# Altium PCB Primerpcb.PcbDoc
Units mm, origin at the board's own origin, x right, y up, seen from the top; angles counter-clockwise.
Board outline 40.26 x 40.5 mm, 2 copper layers (Top Layer, Bottom Layer); 10 components, 6 nets, 26 pads, 0 vias.
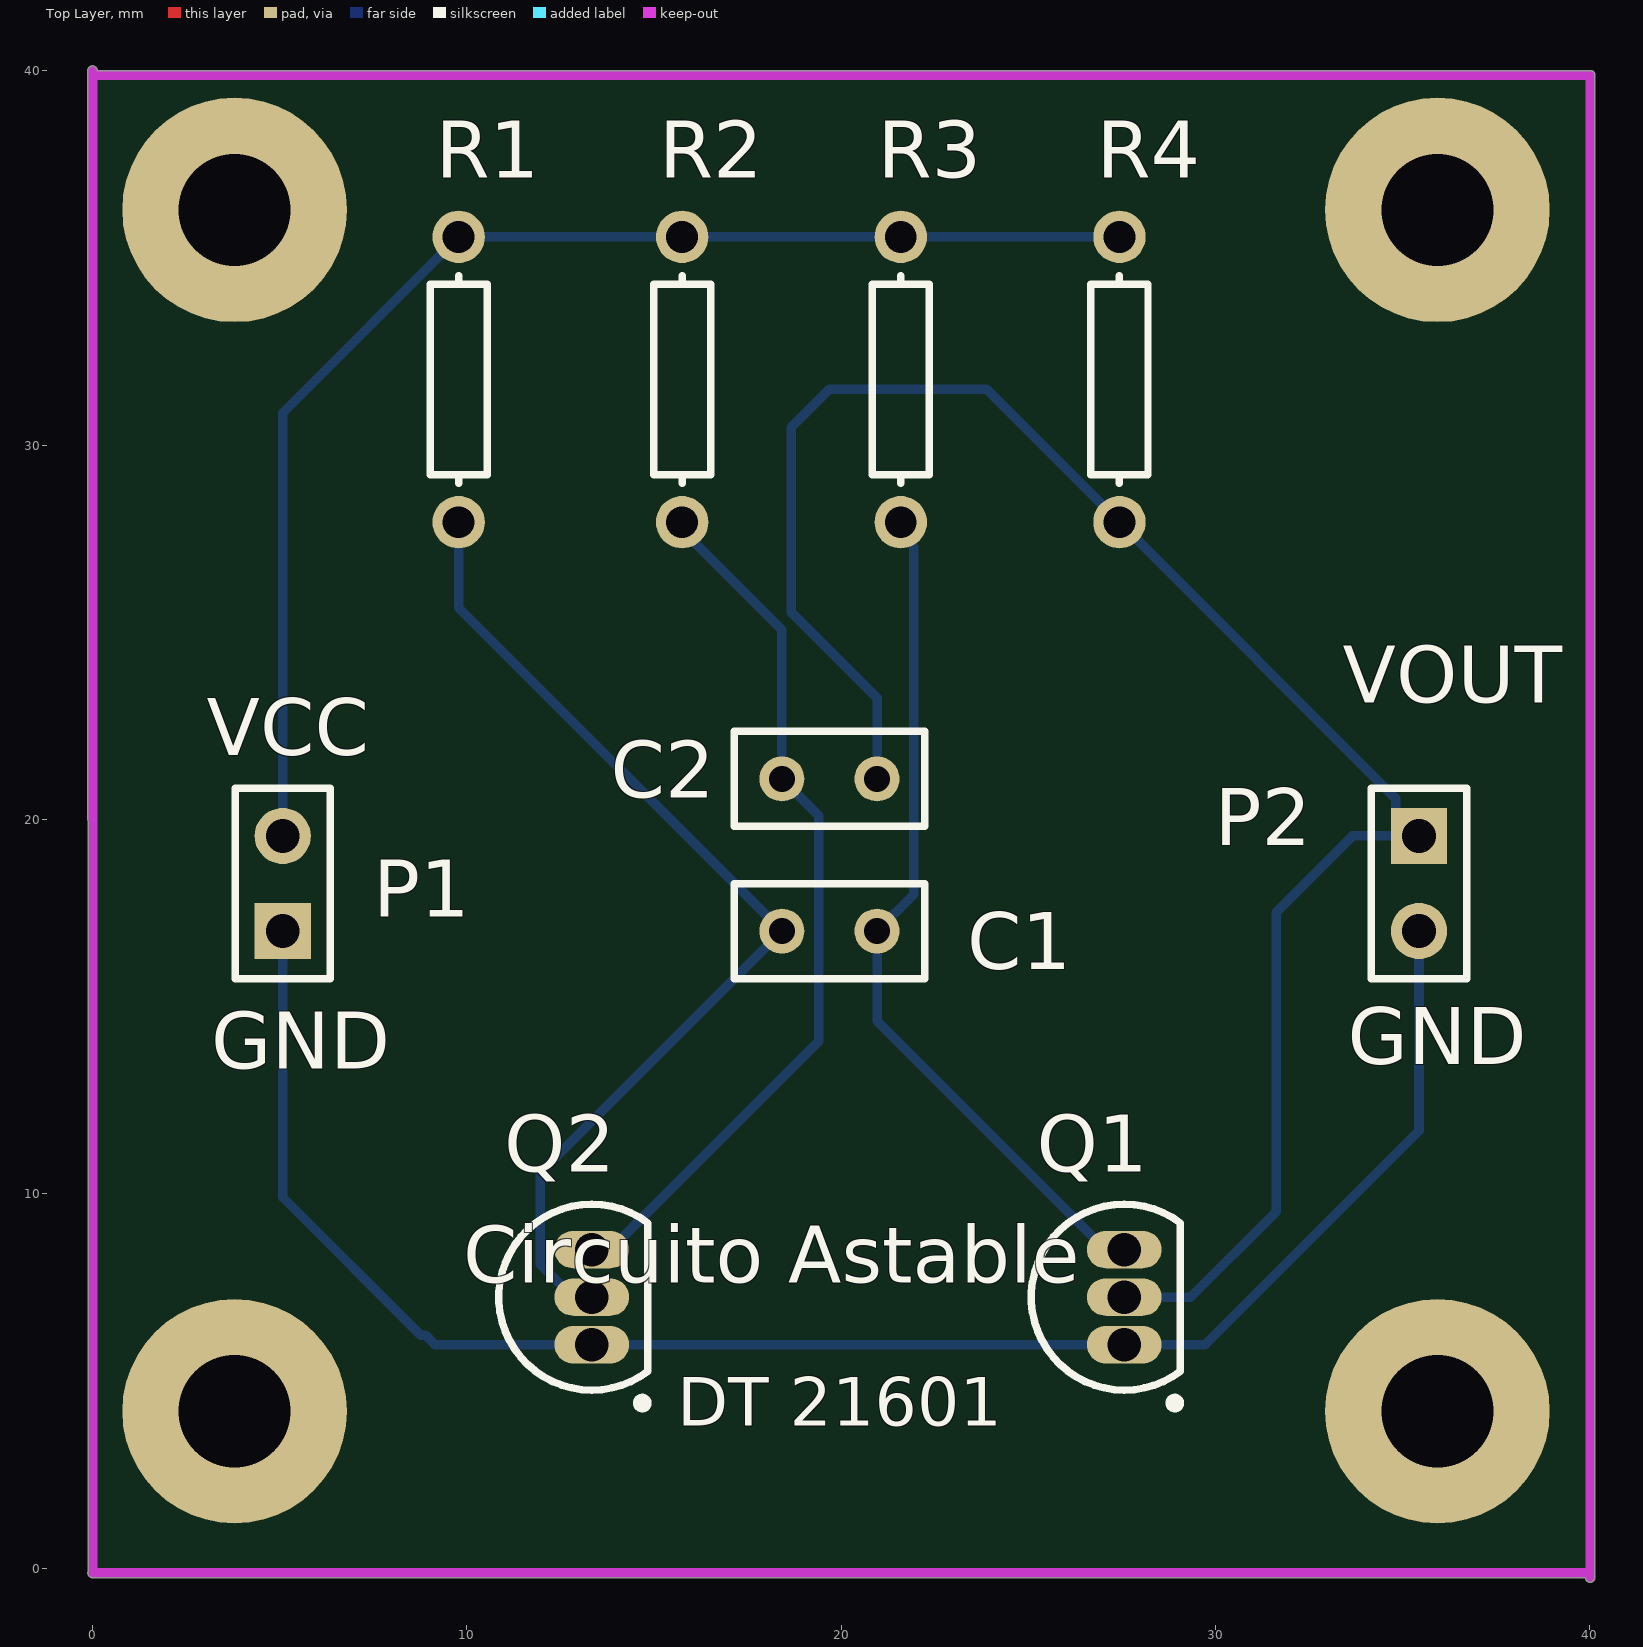
[diagram p0: Top Layer view]
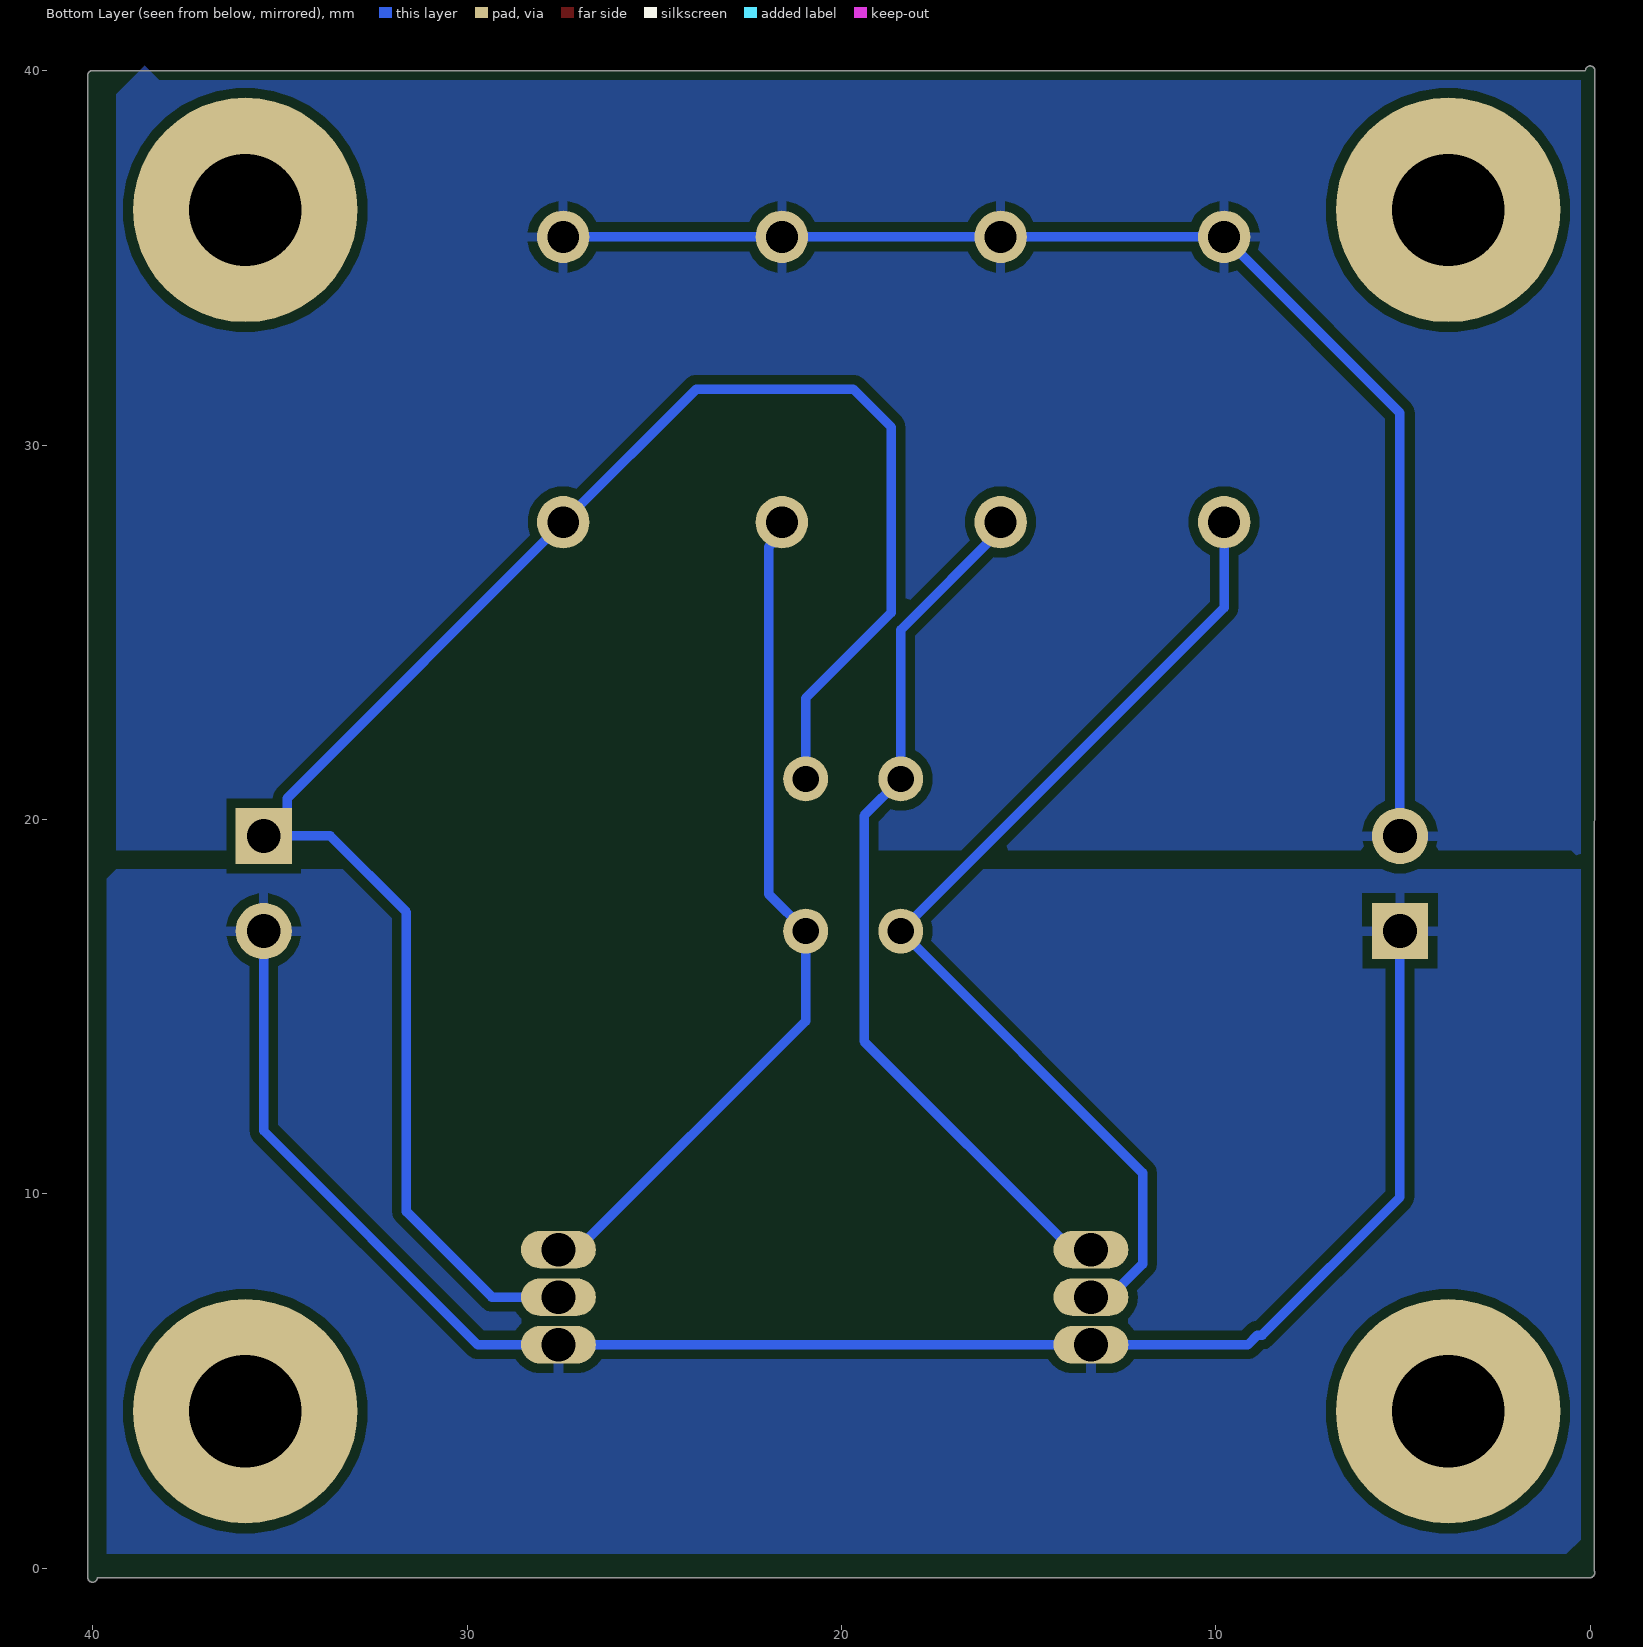
[diagram p1: Bottom Layer view, seen from below]

## Layer stack, top to bottom
Top Solder: solder mask 0.0102, Solder Resist, Dk 3.5
Top Layer: signal copper 0.0356
Dielectric 1: dielectric 0.32, FR-4, Dk 4.8
Bottom Layer: signal copper 0.0356
Bottom Solder: solder mask 0.0102, Solder Resist, Dk 3.5

## Board outline
-0.108,-0.068 ccw(c0.005,-0.127) 0.005,-0.254 39.878,-0.254 ccw(c40.005,-0.249) 40.132,-0.249 40.132,39.878 ccw(c40.005,39.878) 40.005,40.005 0.127,40.005 ccw(c0,40) -0.127,40

## Design rules (kind name [scope] priority, off if disabled: settings)
Clearance [All] p1: gap=0.254 ignorepadtopadclearanceinfootprint=FALSE except(0: Arc-Hole Track-Hole SMDPad-Hole THPad-Hole Via-Hole Fill-Hole Poly-Hole Region-Hole Text-Hole)
PolygonConnect [All] p1: connectstyle=Relief reliefconductorwidth=0.254 reliefentries=4 polygonreliefangle="90 Angle" airgapwidth=0.254
RoutingVias [All] p1: holewidth=0.711 width=1.27 viastyle="Through Hole" minholewidth=0.711 minwidth=1.27 maxholewidth=0.711 maxwidth=1.27
SolderMaskExpansion [All] p1: expansion=0.102 istentingtop=FALSE
Width [All] p1: maxlimit=0.254 minlimit=0.254 preferedwidth=0.254
30 further rules are at their usual default settings.

## Components (designator, comment, footprint, x,y, rotation, side; value= is the part's Value field where it differs from the comment)
C1 "Cap" RAD-0.1 19.685,17.018 r0 top value=20nF
C2 "Cap" RAD-0.1 19.685,21.082 r180 top value=20nF
P1 "Header 2" HDR1X2 5.08,17.018 r90 top
P2 "Header 2" HDR1X2 35.433,19.558 r270 top
Q1 "2N3904" TO-92A 27.559,7.239 r0 top
Q2 "2N3904" TO-92A 13.335,7.239 r0 top
R1 "Res1" AXIAL-0.3 9.779,31.75 r90 top value=1K
R2 "Res1" AXIAL-0.3 15.748,31.75 r90 top value=1K
R3 "Res1" AXIAL-0.3 21.59,31.75 r90 top value=1K
R4 "Res1" AXIAL-0.3 27.432,31.75 r90 top value=1K

## Footprints (in the part's own frame and the unit in brackets; to place one, negate y for a bottom-side part, rotate by r counter-clockwise, add the part's x,y. Pads: shape width x height; smd on the part's side, far side on the other; paste and mask are expansions set on the pad)
AXIAL-0.3 [mm] "Axial Device, Thru-Hole; 2 Leads; 0.3 in Pin Spacing"
  round 1.4 hole 0.85: 1(-3.81,0) 2(3.81,0)
  silkscreen extent -2.77,-0.76 2.77,0.76
HDR1X2 [mm] "Connector; Header; 2 Position"
  rect 1.5x1.5 hole 0.9: 1(0,0)
  round 1.5 hole 0.9: 2(2.54,0)
  silkscreen extent -1.27,-1.27 3.81,1.27
RAD-0.1 [mm] "Radial Cap, Thru-Hole; 2 Leads; 0.1 in Pin Spacing"
  round 1.2 hole 0.7: 1(-1.27,0) 2(1.27,0)
  silkscreen extent -2.54,-1.27 2.54,1.27
TO-92A [mm] "TO, Flat Index; 3 In-Line, Axial Leads; Body Dia. 4.5mm; Leads 0.51 x 0.48 mm (max)"
  oval 2x1 hole 0.9: 1(0,-1.27) 2(0,0) 3(0,1.27)
  silkscreen extent -2.48,-2.95 1.5,2.48, body extent -2.48,-2.5 1.5,2.5, height 6.86

## Part data
C1 C2: "Capacitor", LatestRevisionDate=17-Jul-2002, LatestRevisionNote="Re-released for DXP Platform.", PackageDescription="Radial Cap, Thru-Hole; 2 Leads; 0.3 in Pin Spacing", PackageReference=RAD-0.3, Published=8-Jun-2000, Publisher="Altium Limited"
P1 P2: "Header, 2-Pin", LatestRevisionDate=17-Jul-2002, LatestRevisionNote="Re-released for DXP Platform.", Publisher="Altium Limited"
Q1 Q2: "NPN General Purpose Amplifier", ComponentLink1Description="Manufacturer Link", ComponentLink1URL=http://www.fairchildsemi.com/, ComponentLink2Description=Datasheet, ComponentLink2URL=http://www.fairchildsemi.com/ds/2N%2F2N3904.pdf, DatasheetVersion=1997, LatestRevisionDate=15-Jan-2003, LatestRevisionNote="PCB Footprint 'BCY-W3/D4.7' replaced", PackageDescription="TO, Flat Index; 3 In-Line, Axial Leads; Body Dia. 4.5mm; Leads 0.51 x 0.48 mm (max)", PackageReference=TO-92A, PackageVersion=Sep-1998, Published=8-Jun-2000, Publisher="Altium Limited"
R1 R2 R3 R4: "Resistor", LatestRevisionDate=17-Jul-2002, LatestRevisionNote="Re-released for DXP Platform.", PackageDescription="Axial Device, Thru-Hole; 2 Leads; 0.3 in Pin Spacing", PackageReference=AXIAL-0.3, Published=8-Jun-2000, Publisher="Altium Limited"

## Free pads (board coordinates)
  round 6 hole 3: 0(3.794,4.191) 0(3.794,36.281) 0(35.925,4.191) 0(35.925,36.281)

## Nets (pads, with @x,y where several pads share a name; then routed paths per layer and width w, separated by ;. In a path a pad name is that pad's centre, name@x,y a point inside that pad or via, vN(x,y) a via of type N, cw(c..) or ccw(c..) an arc to the next point about the centre after c; other vN are vias at no path point)
GND: P1.1 P2.2 Q1.1 Q2.1 | length 46.8
  Bottom Layer w0.254: P1.1 5.08,9.906 8.763,6.223 8.89,6.223 9.144,5.969 Q2.1 Q1.1 29.718,5.969 35.433,11.684 P2.2
NetC1_1: C1.1 Q2.2 R1.1 | length 27.8
  Bottom Layer w0.254: R1.1 9.779,25.654 C1.1 11.954,10.557 11.954,8.12 12.835,7.239 Q2.2
NetC1_2: C1.2 Q1.3 R3.1 | length 23
  Bottom Layer w0.254: R3.1 21.59,27.63 21.936,27.284 21.936,17.999 C1.2 20.955,14.613 27.059,8.509 Q1.3
NetC2_2: C2.2 Q2.3 R2.1 | length 23.7
  Bottom Layer w0.254: Q2.3 13.835,8.509 19.396,14.07 19.396,20.101 C2.2 18.415,25.063 15.748,27.73 R2.1
VCC: P1.2 R1.2 R2.2 R3.2 R4.2 | length 35.6
  Bottom Layer w0.254: P1.2 5.08,30.861 R1.2 12.76,35.56 12.767,35.567 15.741,35.567 R2.2 R4.2
Vout: C2.1 P2.1 Q1.2 R4.1 | length 50.4
  Bottom Layer w0.254: C2.1 20.955,23.241 18.669,25.527 18.669,30.48 19.685,31.496 23.876,31.496 R4.1 34.81,20.562 34.81,20.181 P2.1 33.655,19.558 31.623,17.526 31.623,9.525 29.337,7.239 Q1.2

## Polygon pours and split planes (outlines as drawn)
GND on Bottom Layer "GND_L02_P001" (solid, remove dead copper, pour order 1): 0.254,18.669 39.37,18.669 39.624,18.415 39.624,0.381 0.635,0.381 0.254,0.762
VCC on Bottom Layer "VCC_L02_P000" (solid, remove dead copper, pour order 0): 0.254,18.923 0.508,19.177 39.37,19.177 39.37,39.37 38.608,40.132 38.227,39.751 0.254,39.751

## Keep-outs
Top Layer:
  lines w0.254: 0,0 0,40 ; 0.005,-0.127 40.005,-0.127 ; 0.005,39.878 40.005,39.878 ; 40.005,-0.249 40.005,39.751

## Silkscreen, mask and mechanical layers (free items; w line width, h text height)
Top Overlay:
  text "VOUT" at 33.401,23.114 h1.52
  text "VCC" at 3.048,21.717 h1.52
  text "GND" at 33.528,13.462 h1.52
  text "GND" at 3.175,13.335 h1.52
  text "Circuito Astable" at 9.906,7.62 h1.52
  text "DT 21601" at 15.621,3.81 h1.3